# Altium PCB TSALLATCH.PcbDoc
Units mm, origin at the board's own origin, x right, y up, seen from the top; angles counter-clockwise.
Board outline 35.81 x 32.64 mm, 2 copper layers (Top Layer, Bottom Layer); 16 components, 12 nets, 54 pads, 9 vias.
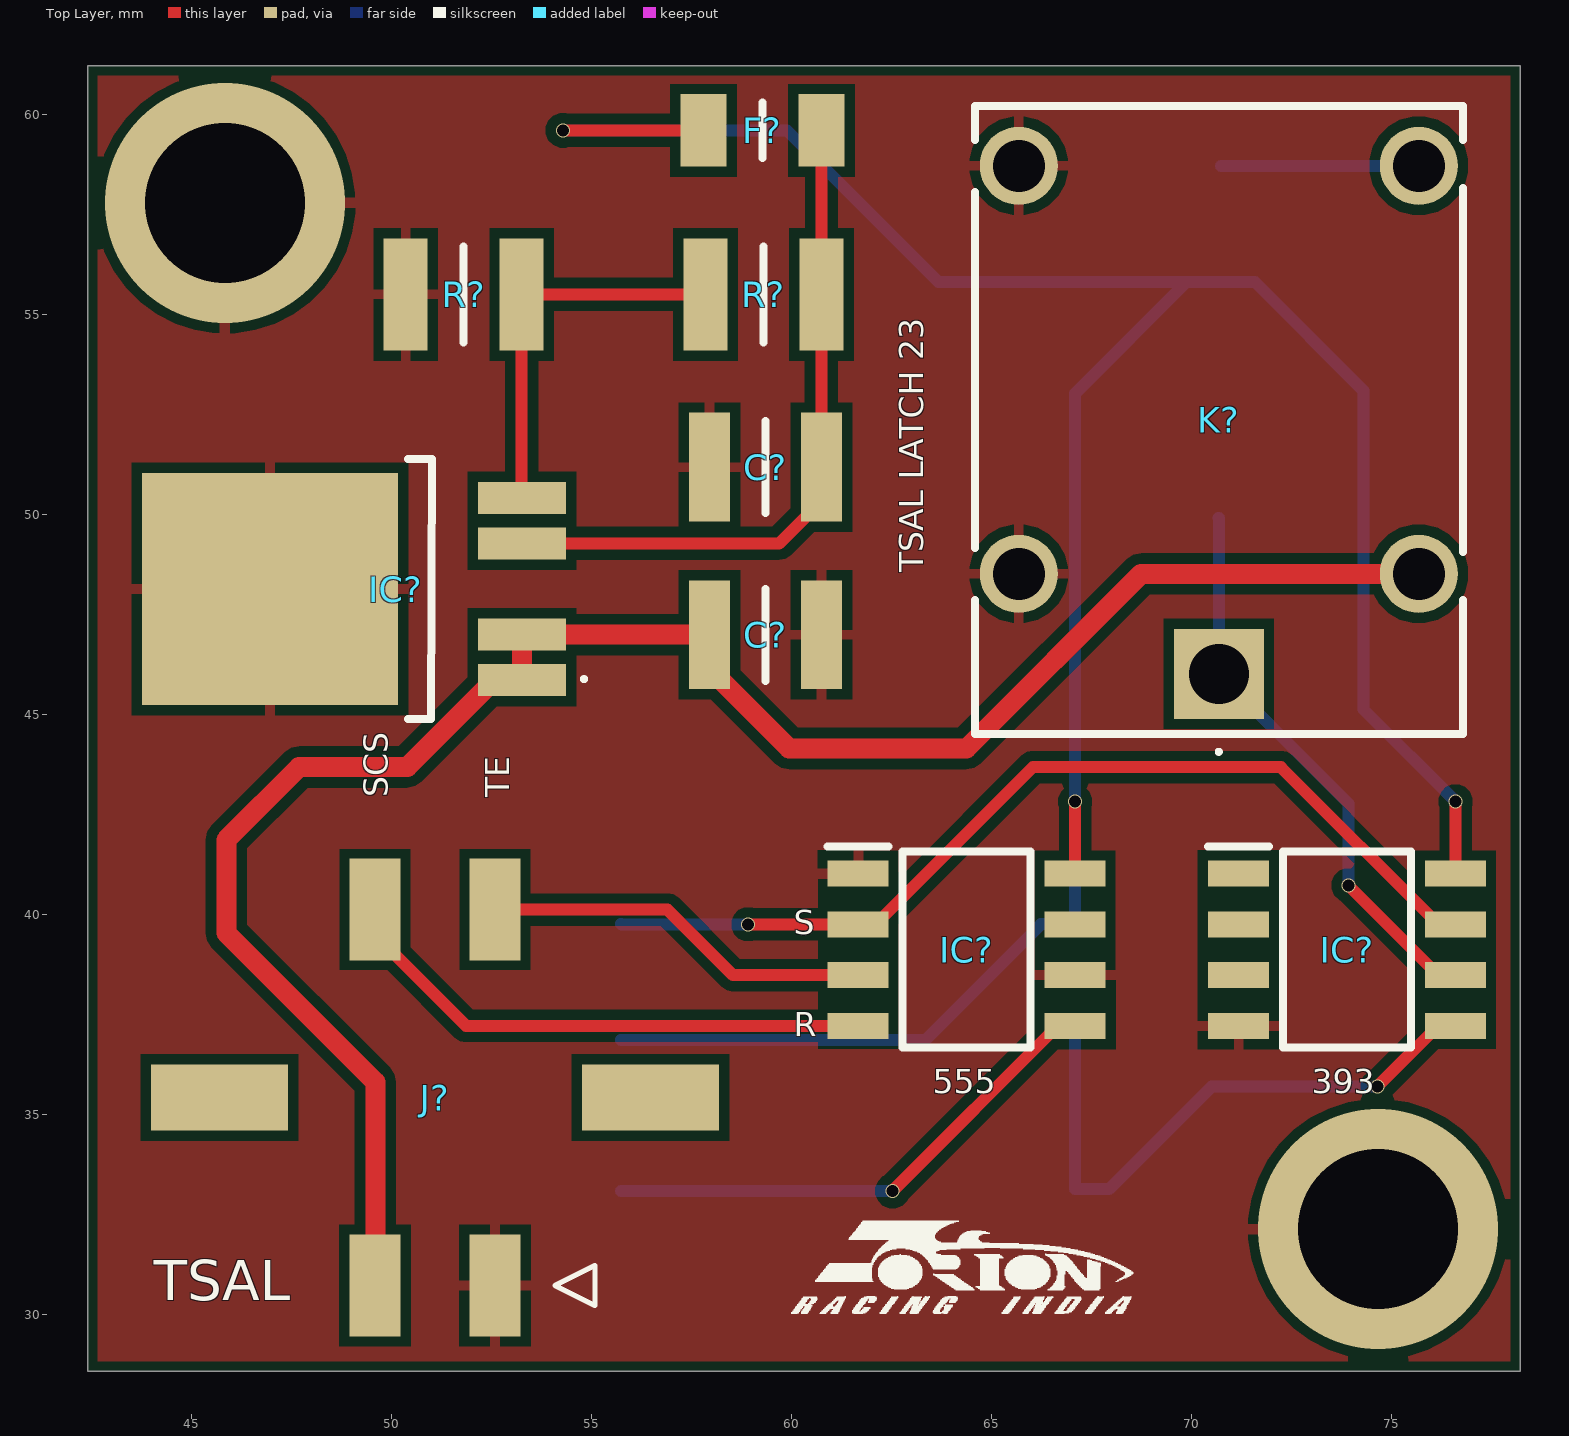
[diagram p0: Top Layer view]
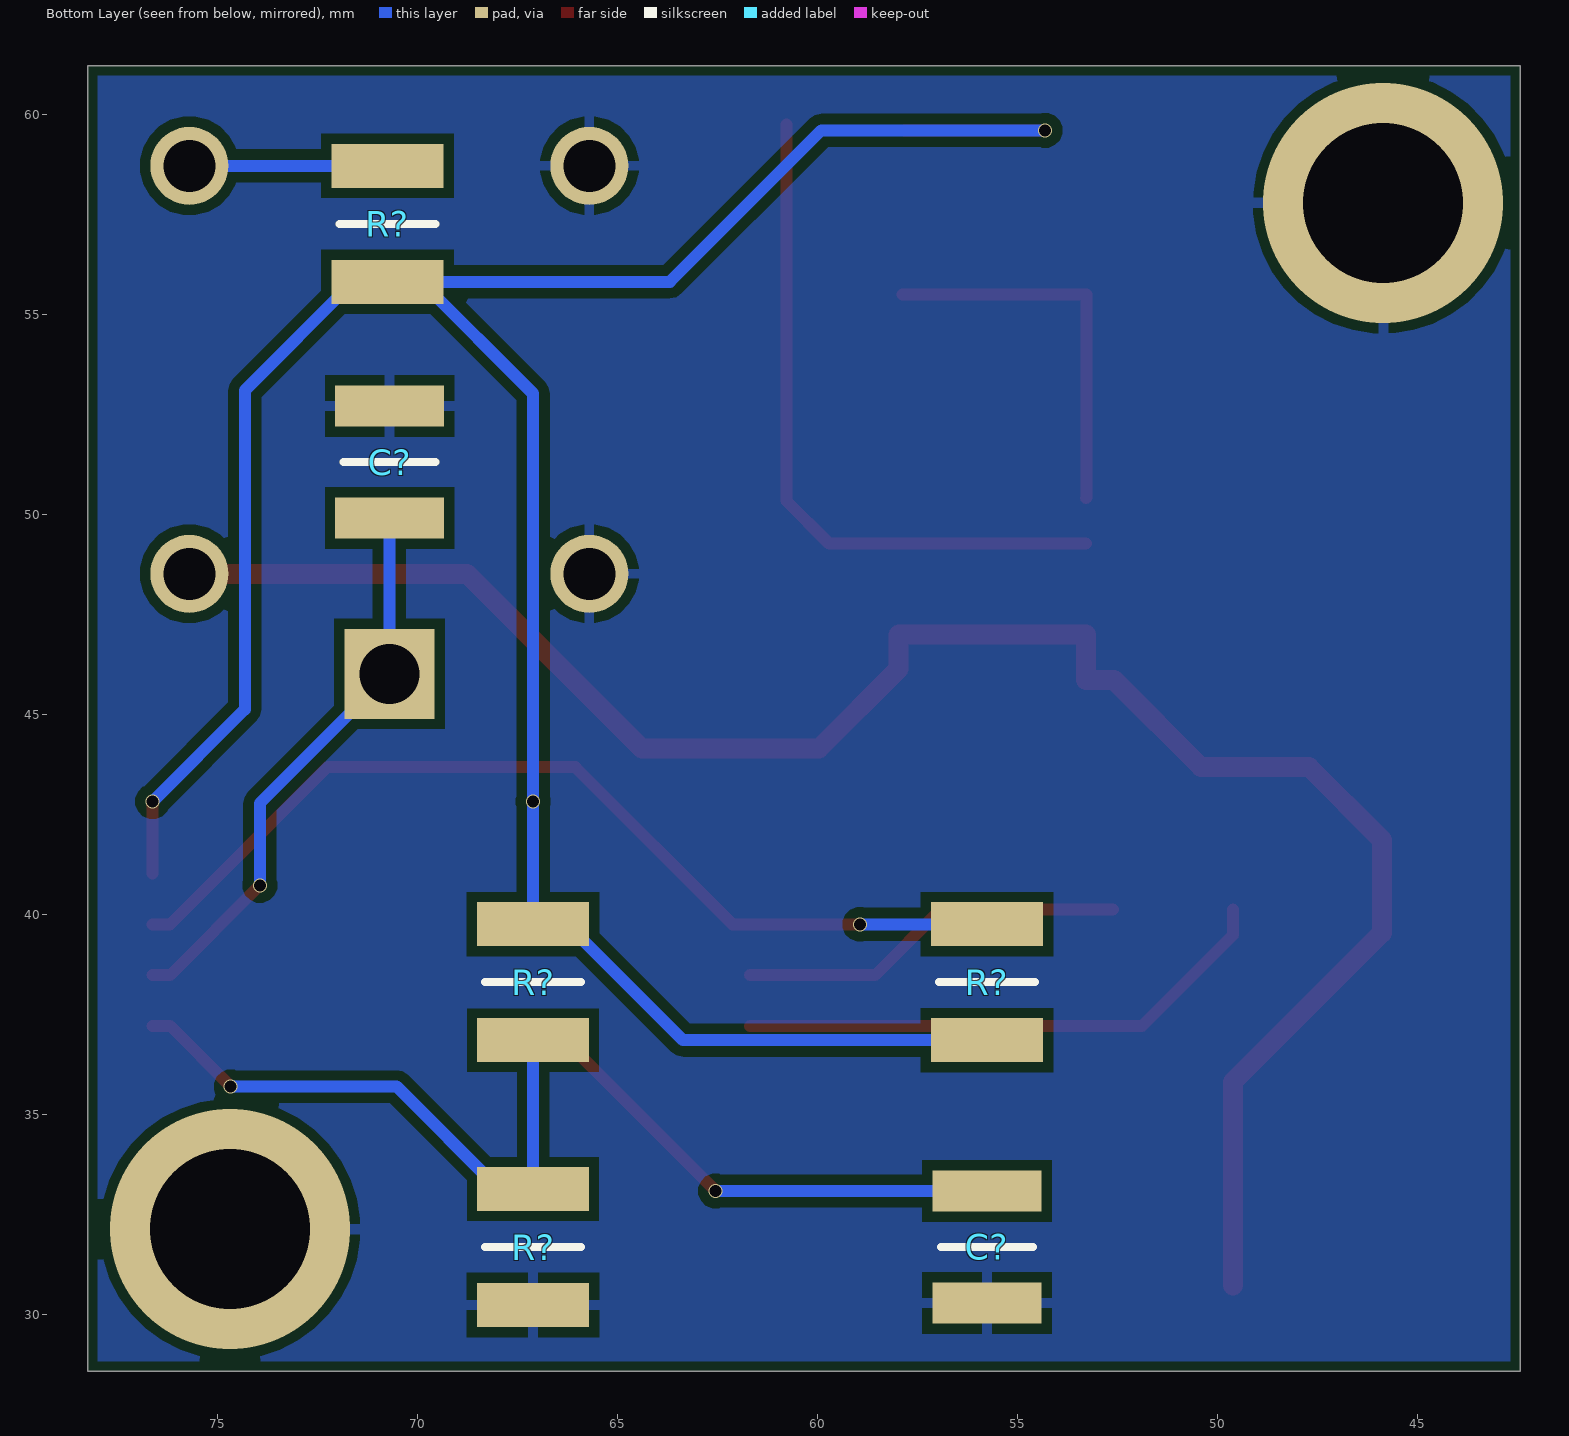
[diagram p1: Bottom Layer view, seen from below]
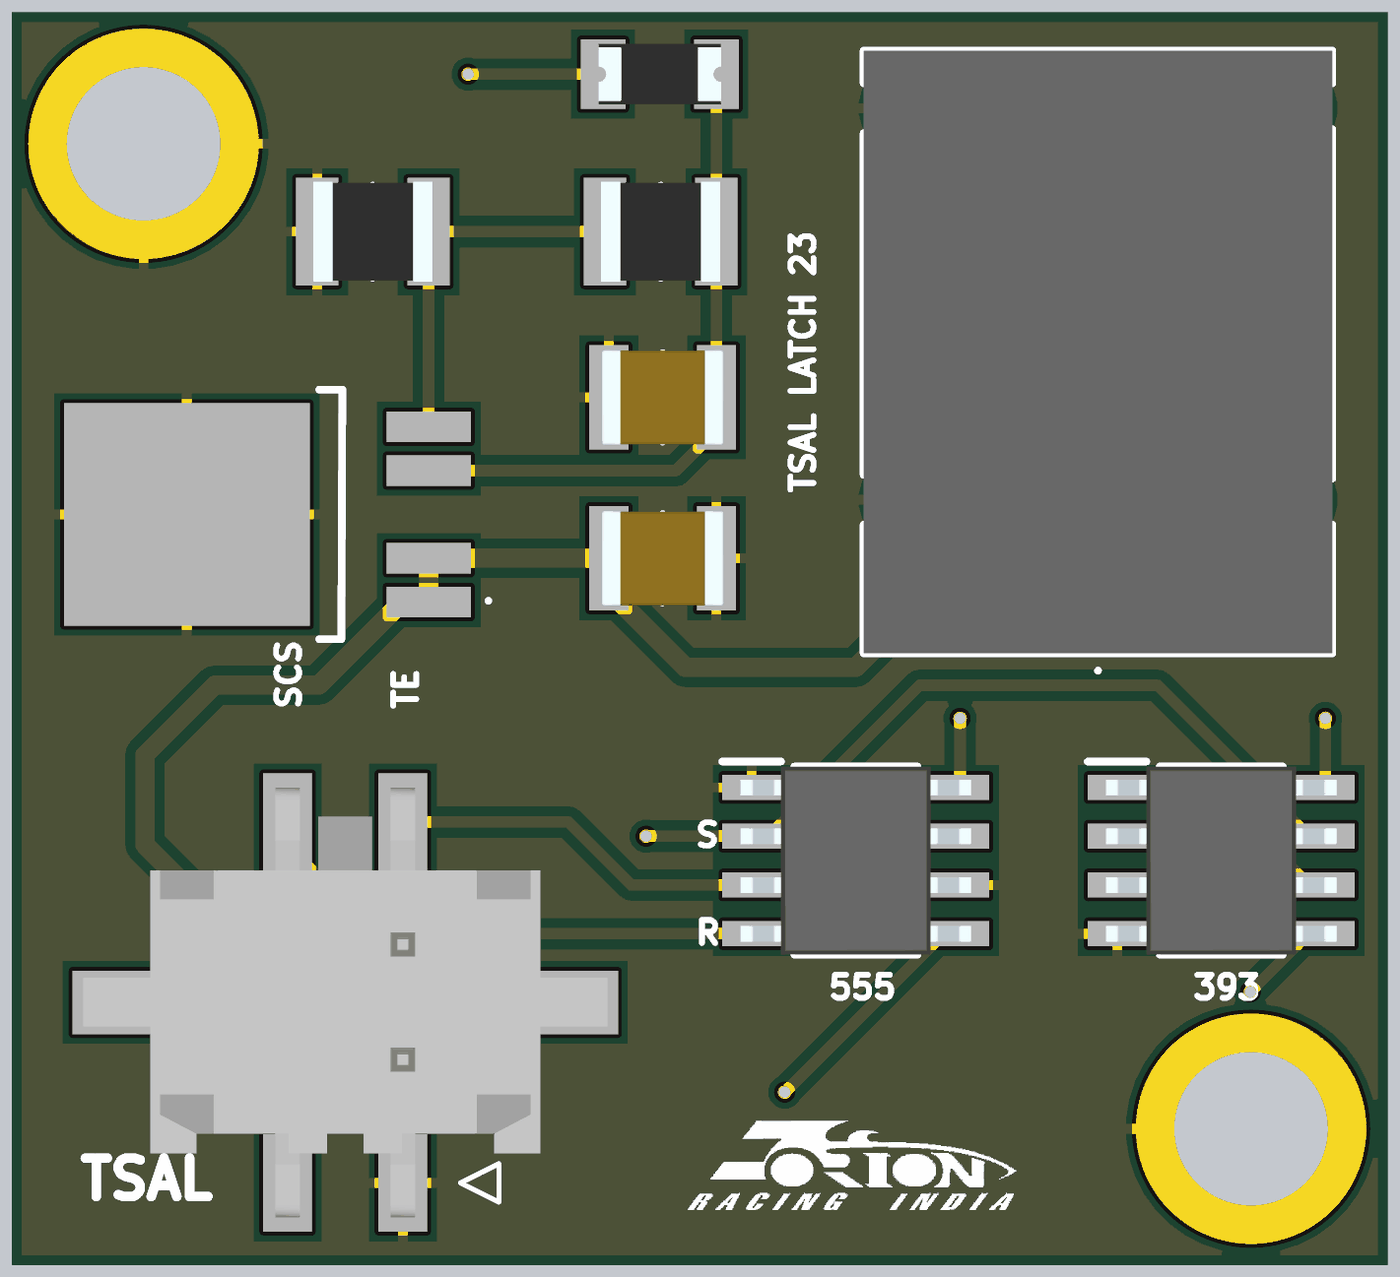
[diagram p2: 3D render of the assembled board from above, using the file's embedded part models]
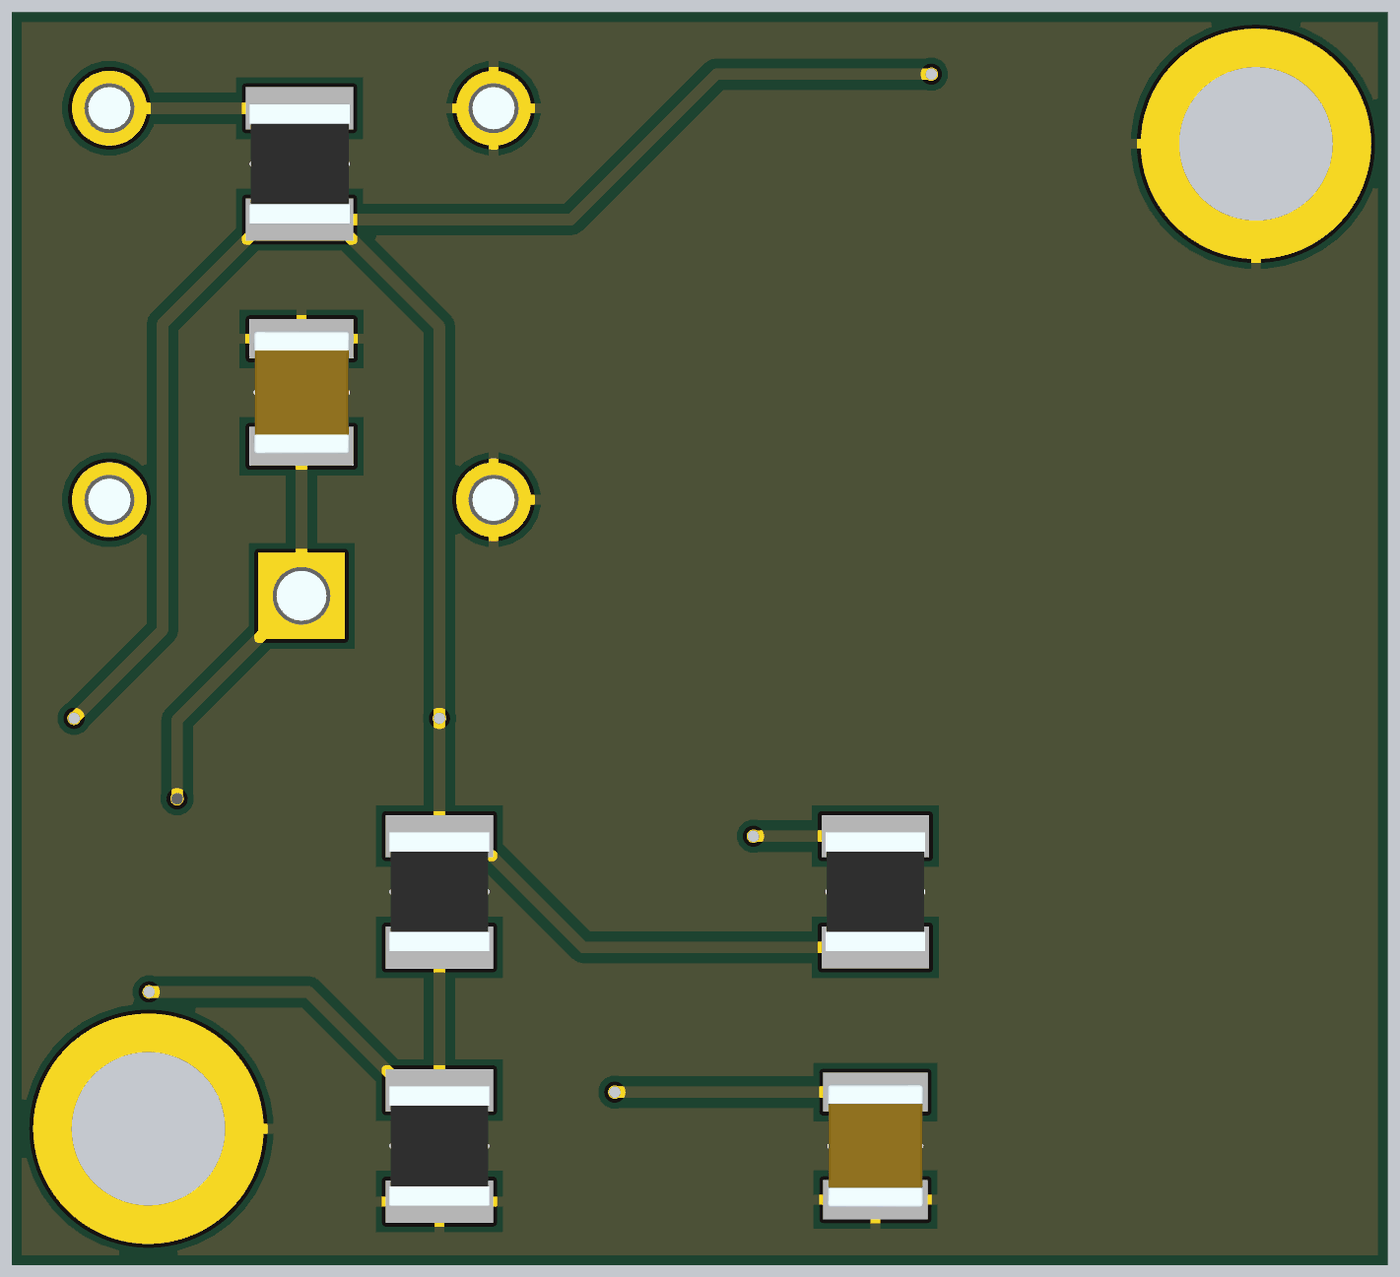
[diagram p3: 3D render of the assembled board from below, using the file's embedded part models]

## Layer stack, top to bottom
Top Solder: solder mask 0.0102, Solder Resist, Dk 3.5
Top Layer: signal copper 0.0356
Dielectric 1: dielectric 0.32, FR-4, Dk 4.8
Bottom Layer: signal copper 0.0356
Bottom Solder: solder mask 0.0102, Solder Resist, Dk 3.5

## Board outline
42.418,61.214 78.232,61.214 78.232,28.575 42.418,28.575

## Design rules (kind name [scope] priority, off if disabled: settings)
Clearance [All] p1: gap=0.254 ignorepadtopadclearanceinfootprint=FALSE except(0: Arc-Hole Track-Hole SMDPad-Hole THPad-Hole Via-Hole Fill-Hole Poly-Hole Region-Hole Text-Hole)
PolygonConnect [All] p1: connectstyle=Relief reliefconductorwidth=0.254 reliefentries=4 polygonreliefangle="90 Angle" airgapwidth=0.254
RoutingVias [All] p1: holewidth=0.3 width=0.35 viastyle="Through Hole" minholewidth=0.3 minwidth=0.35 maxholewidth=0.6 maxwidth=0.75
SolderMaskExpansion [All] p1: expansion=0.102 istentingtop=FALSE
Width [All] p1: maxlimit=0.5 minlimit=0.3 preferedwidth=0.3
30 further rules are at their usual default settings.

## Classes and differential pairs
component class TSALLATCH: C? F? IC? J? K? R?

## Components (designator, comment, footprint, x,y, rotation, side; value= is the part's Value field where it differs from the comment)
C? "10uF" CAPC3225X88N 59.36,51.181 r180 top
C? "10uF" CAPC3225X88N 59.36,46.99 r0 top
C? "10uF" CAPC3225X88N 70.688,51.308 r270 bottom
C? "0.1uF" CAPC3225X88N 55.753,31.684 r90 bottom
F? "NANOSMDC020F-2" NANOSMDC016F2 59.285,59.6 r0 top
IC? "LM393D" SOIC127P600X175-8N 73.9,39.116 r0 top
IC? "TLF1963TEATMA1" TLF1963TEATMA1 49.022,48.133 r90 top
IC? "NE555DRG4" SOIC127P600X175-8N 64.389,39.116 r0 top
J? "43045-0419" 43045-04YY_181920 51.097,35.421 r0 top
K? "SCA20-20-12VDC-C" SCA202012VDCC 70.692,46.014 r270 top
R? "10K" RESC3126X60N 59.309,55.499 r0 top
R? "3.3K" RESC3126X60N 51.816,55.499 r180 top
R? "3.9K" RESC3126X60N 67.101,38.303 r90 bottom
R? "10K" RESC3126X60N 55.753,38.303 r270 bottom
R? "2.2K" RESC3126X60N 67.101,31.684 r90 bottom
R? "220K" RESC3126X60N 70.742,57.264 r270 bottom

## Footprints (in the part's own frame and the unit in brackets; to place one, negate y for a bottom-side part, rotate by r counter-clockwise, add the part's x,y. Pads: shape width x height; smd on the part's side, far side on the other; paste and mask are expansions set on the pad)
43045-04YY_181920 [mm]
  rect 1.27x2.54 smd: 1(1.5,-4.7) 2(-1.5,-4.7) 3(1.5,4.7) 4(-1.5,4.7)
  rect 3.43x1.65 smd: 5(5.385,0) 6(-5.385,0)
  silkscreen extent 3,-5.2 4,-4.2, body extent -6.83,-5.6 6.83,5.6, height 9.96
CAPC3225X88N [mm]
  rect 1.02x2.72 smd: 1(-1.4,0) 2(1.4,0)
  silkscreen extent 0,-1.15 0,1.15, body extent -1.6,-1.25 1.6,1.25, height 0.88
NANOSMDC016F2 [mm]
  rect 1.16x1.81 smd: 1(-1.475,0) 2(1.475,0)
  silkscreen extent 0,-0.69 0,0.69, body extent -1.6,-0.79 1.6,0.79, height 0.82
RESC3126X60N [mm]
  rect 1.1x2.8 smd: 1(-1.45,0) 2(1.45,0)
  silkscreen extent 0,-1.2 0,1.2, body extent -1.55,-1.3 1.55,1.3, height 0.6
SCA202012VDCC [mm]
  rect 2.25x2.25 hole 1.5: 1(0,0)
  round 1.95 hole 1.3: 2(-2.5,5) 3(-12.7,5) 4(-12.7,-5) 5(-2.5,-5)
  silkscreen extent -14.2,-6.1 2,6.1, body extent -14.2,-6.1 1.5,6.1, height 13.8
SOIC127P600X175-8N [mm]
  rect 1.525x0.65 smd: 1(-2.712,1.905) 2(-2.712,0.635) 3(-2.712,-0.635) 4(-2.712,-1.905) 5(2.712,-1.905) 6(2.712,-0.635) 7(2.712,0.635) 8(2.712,1.905)
  silkscreen extent -3.47,-2.45 1.6,2.58, body extent -3,-2.45 3,2.45, height 1.75
TLF1963TEATMA1 [mm]
  rect 0.8x2.2 smd: 1(-2.28,-4.25) 2(-1.14,-4.25) 4(1.14,-4.25) 5(2.28,-4.25)
  rect 5.8x6.4 smd: 3(0,2.05)
  silkscreen extent -3.25,-5.85 3.25,-1.4

## Part data
C? C? C? C?: library part C1210C273KARACTU, "Capacitor", Manufacturer_Name=Kemet, Mouser Part Number=80-C1210C273KAR, Datasheet Link=https://content.kemet.com/datasheets/KEM_C1011_X7R_TIP_RING_SMD.pdf, Height=0.88mm, Manufacturer_Part_Number=C1210C273KARACTU, Mouser Price/Stock=https://www.mouser.co.uk/ProductDetail/KEMET/C1210C273KARACTU?qs=iK5Mdz3fWPgSn%252Bljrz49ZA%3D%3D
F?: "Resettable Fuse", Manufacturer_Name=LITTELFUSE, Mouser Part Number=650-NANOSMDC020F-2, Arrow Part Number=NANOSMDC020F-2, Arrow Price/Stock=https://www.arrow.com/en/products/nanosmdc020f-2/littelfuse, Datasheet Link=https://www.littelfuse.com/~/media/electronics/datasheets/resettable_ptcs/littelfuse_ptc_nanosmdc_datasheet.pdf.pdf, Height=1mm, Manufacturer_Part_Number=NANOSMDC020F-2, Mouser Price/Stock=https://www.mouser.co.uk/ProductDetail/Littelfuse/NANOSMDC020F-2?qs=iK0evp%252BCRRU6agwMt7HYjg%3D%3D
IC?: "Integrated Circuit", Manufacturer_Name=STMicroelectronics, Mouser Part Number=511-LM393D, Arrow Part Number=LM393D, Arrow Price/Stock=https://www.arrow.com/en/products/lm393d/stmicroelectronics?region=europe, Datasheet Link=http://www.st.com/st-web-ui/static/active/en/resource/technical/document/datasheet/CD00000465.pdf, Height=1.75mm, Manufacturer_Part_Number=LM393D, Mouser Price/Stock=https://www.mouser.co.uk/ProductDetail/STMicroelectronics/LM393D?qs=htKRmzjvioSpfPyLiLnV1A%3D%3D
IC?: "Integrated Circuit", Manufacturer_Name=Infineon, Mouser Part Number=726-TLF1963TEATMA1, Arrow Part Number=TLF1963TEATMA1, Arrow Price/Stock=https://www.arrow.com/en/products/tlf1963teatma1/infineon-technologies-ag?region=nac, Datasheet Link=https://www.infineon.com/dgdl/Infineon-TLF1963-DS-v01_00-EN.pdf?fileId=5546d46258fc0bc1015969d2981941e0, Height=2.35mm, Manufacturer_Part_Number=TLF1963TEATMA1, Mouser Price/Stock=https://www.mouser.co.uk/ProductDetail/Infineon-Technologies/TLF1963TEATMA1?qs=SiyfpgnvCZluIGE%2FbZiglw%3D%3D
IC?: "Integrated Circuit", Manufacturer_Name="Texas Instruments", Mouser Part Number=595-NE555DRG4, Arrow Part Number=NE555DRG4, Arrow Price/Stock=https://www.arrow.com/en/products/ne555drg4/texas-instruments?region=nac, Datasheet Link=http://www.mouser.com/ds/2/405/ne555-557499.pdf, Height=1.75mm, Manufacturer_Part_Number=NE555DRG4, Mouser Price/Stock=https://www.mouser.co.uk/ProductDetail/Texas-Instruments/NE555DRG4?qs=rLYyFdxB%2FmreBHawQCpQ0Q%3D%3D
J?: "Connector", Manufacturer_Name=Molex, Mouser Part Number=538-43045-0419, Datasheet Link=https://www.molex.com/pdm_docs/sd/430450218_sd.pdf, Height=9.91mm, Manufacturer_Part_Number=43045-0419, Mouser Price/Stock=https://www.mouser.co.uk/ProductDetail/Molex/43045-0419?qs=UeCeOHRHQebVNIQyI9VWWg%3D%3D
K?: "Relay or Contactor", Manufacturer_Name=LEONE, Datasheet Link=https://www.kuraelectronics.com/new-pdf/SCA%2020.pdf, Height=13.7mm, Manufacturer_Part_Number=SCA20-20-12VDC-C
R? R? R? R? R? R?: library part RC1210JR-070RL, "Resistor", Manufacturer_Name="YAGEO (PHYCOMP)", Mouser Part Number=603-RC1210JR-070RL, Arrow Part Number=RC1210JR-070RL, Arrow Price/Stock=https://www.arrow.com/en/products/rc1210jr-070rl/yageo, Datasheet Link=https://datasheet.datasheetarchive.com/originals/distributors/Datasheets_SAMA/902f9e387b938f871d31120f5fc1d65e.pdf, Height=0.6mm, Manufacturer_Part_Number=RC1210JR-070RL, Mouser Price/Stock=https://www.mouser.co.uk/ProductDetail/YAGEO/RC1210JR-070RL?qs=eVUp2xEqV%2FtpfK61W3Q4CQ%3D%3D

## Via types
v1: diameter 0.35, hole 0.3, Top Layer to Bottom Layer, 7 vias
v2: diameter 6, hole 4, Top Layer to Bottom Layer, 2 vias

## Nets (pads, with @x,y where several pads share a name; then routed paths per layer and width w, separated by ;. In a path a pad name is that pad's centre, name@x,y a point inside that pad or via, vN(x,y) a via of type N, cw(c..) or ccw(c..) an arc to the next point about the centre after c; other vN are vias at no path point)
5V: C?.1@60.76,51.181 F?.2 IC?.4@53.272,49.273 R?.2@60.759,55.499 | length 17.3
  Top Layer w0.3: IC?.4@53.272,49.273 59.702,49.273 60.76,50.331 C?.1@60.76,51.181 ; C?.1@60.759,51.182 60.759,55.499 60.76,55.5 F?.2@60.76,59.744
+5: F?.1 IC?.8 R?.2@55.753,36.853 R?.2@67.101,39.753 R?.2@70.742,55.814 | length 70.8
  Top Layer w0.3: v1(54.297,59.6) F?.1 ; IC?.8@67.101,41.021 v1(67.101,42.822) ; IC?.8@76.612,41.021 v1(76.612,42.822)
  Bottom Layer w0.3: v1(54.297,59.6) 59.895,59.6 63.681,55.814 R?.2@69.892,55.814 ; R?.2@55.753,36.853 63.351,36.853 66.251,39.753 67.101,39.753 v1(67.101,42.822) 67.101,53.023 R?.2@69.892,55.814 ; v1(76.612,42.822) 74.308,45.126 74.308,53.098 71.592,55.814 70.742,55.814 R?.2@69.892,55.814
+12: C?.1@57.96,46.99 IC?.1@53.272,45.853 IC?.2@53.272,46.993 J?.2 K?.2 | length 48.8
  Top Layer w0.5: J?.2 49.605,30.729 49.605,35.809 45.881,39.533 45.881,41.865 47.701,43.685 50.404,43.685 52.572,45.853 53.272,45.853 53.272,46.993 57.957,46.993 57.96,46.99 57.96,46.14 59.954,44.146 64.383,44.146 68.751,48.514 K?.2
GND: C?.1@55.753,30.284 C?.1@70.688,52.708 C?.2@57.96,51.181 C?.2@60.76,46.99 IC?.1@61.677,41.021 IC?.3@46.972,48.133 IC?.4@71.188,37.211 IC?.6@67.101,38.481 J?.1 K?.4 K?.5 R?.1@67.101,30.234 R?.2@50.366,55.499
  other v2: 74.676,32.131 45.847,57.785
NetC?_2: C?.2@55.753,33.084 IC?.5@67.101,37.211 | length 13.1
  Top Layer w0.3: v1(62.537,33.084) 66.664,37.211 IC?.5@67.101,37.211
  Bottom Layer w0.3: C?.2@55.753,33.084 v1(62.537,33.084)
NetIC?_5: IC?.5@53.272,50.413 R?.1@53.266,55.499 R?.1@57.859,55.499 | length 9.7
  Top Layer w0.3: IC?.5@53.272,50.413 53.266,50.419 53.266,55.499 R?.1@57.859,55.499
NetK?_3: K?.3 R?.1@70.742,58.714 | length 5
  Bottom Layer w0.3: R?.1@70.742,58.714 K?.3
REF: IC?.5@76.612,37.211 R?.1@67.101,36.853 R?.2@67.101,33.134 | length 14.9
  Top Layer w0.3: v1(74.659,35.695) 76.175,37.211 IC?.5@76.612,37.211
  Bottom Layer w0.3: R?.1@67.101,36.853 67.101,33.134 67.951,33.134 70.512,35.695 v1(74.659,35.695)
SCS: IC?.4@61.677,37.211 J?.4 | length 13.7
  Top Layer w0.3: J?.4 49.597,39.486 51.872,37.211 IC?.4@61.677,37.211
SET: IC?.2@61.677,39.751 IC?.7@76.612,39.751 R?.1@55.753,39.753 | length 24.1
  Top Layer w0.3: v1(58.928,39.751) 61.677,39.751 62.114,39.751 66.045,43.681 72.244,43.681 76.175,39.751 IC?.7@76.612,39.751
  Bottom Layer w0.3: R?.1@55.753,39.753 55.755,39.751 v1(58.928,39.751)
TSALERROR: IC?.3@61.677,38.481 J?.3 | length 9.8
  Top Layer w0.3: J?.3 56.907,40.121 58.547,38.481 IC?.3@61.677,38.481
X: C?.2@70.688,49.908 IC?.6@76.612,38.481 K?.1 | length 14.1
  Top Layer w0.3: v1(73.93,40.725) 76.175,38.481 IC?.6@76.612,38.481
  Bottom Layer w0.3: C?.2@70.688,49.908 70.692,49.904 K?.1 73.93,42.776 v1(73.93,40.725)
pads on no net: IC?.1@71.188,41.021 IC?.2@71.188,39.751 IC?.3@71.188,38.481 IC?.7@67.101,39.751 J?.5 J?.6

## Polygon pours and split planes (outlines as drawn)
GND on Top Layer "NONET_L-01_P-001" (solid, pour order 0): 42.672,60.96 77.978,60.96 77.978,28.829 42.672,28.829 42.672,32.639
GND on Bottom Layer "NONET_L-01_P-001" (solid, pour order 1): 42.672,60.96 77.978,60.96 77.978,28.829 42.672,28.829

## Silkscreen, mask and mechanical layers (free items; w line width, h text height)
Top Overlay:
  drawing of 18 lines, arcs and shapes, not listed
  text "TSAL LATCH 23" at 63.299,48.555 h0.6 r90
  text "SCS" at 49.911,42.926 h0.6 r90
  text "TE" at 52.959,42.926 h0.6 r90
  text "S" at 60.071,39.497 h0.6
  text "R" at 60.071,36.957 h0.6
  text "555" at 63.536,35.528 h0.6
  text "393" at 73.022,35.528 h0.6
  text "TSAL" at 44.069,30.353 h1